# EAGLE board ruido_v5_led (EAGLE 5.10)
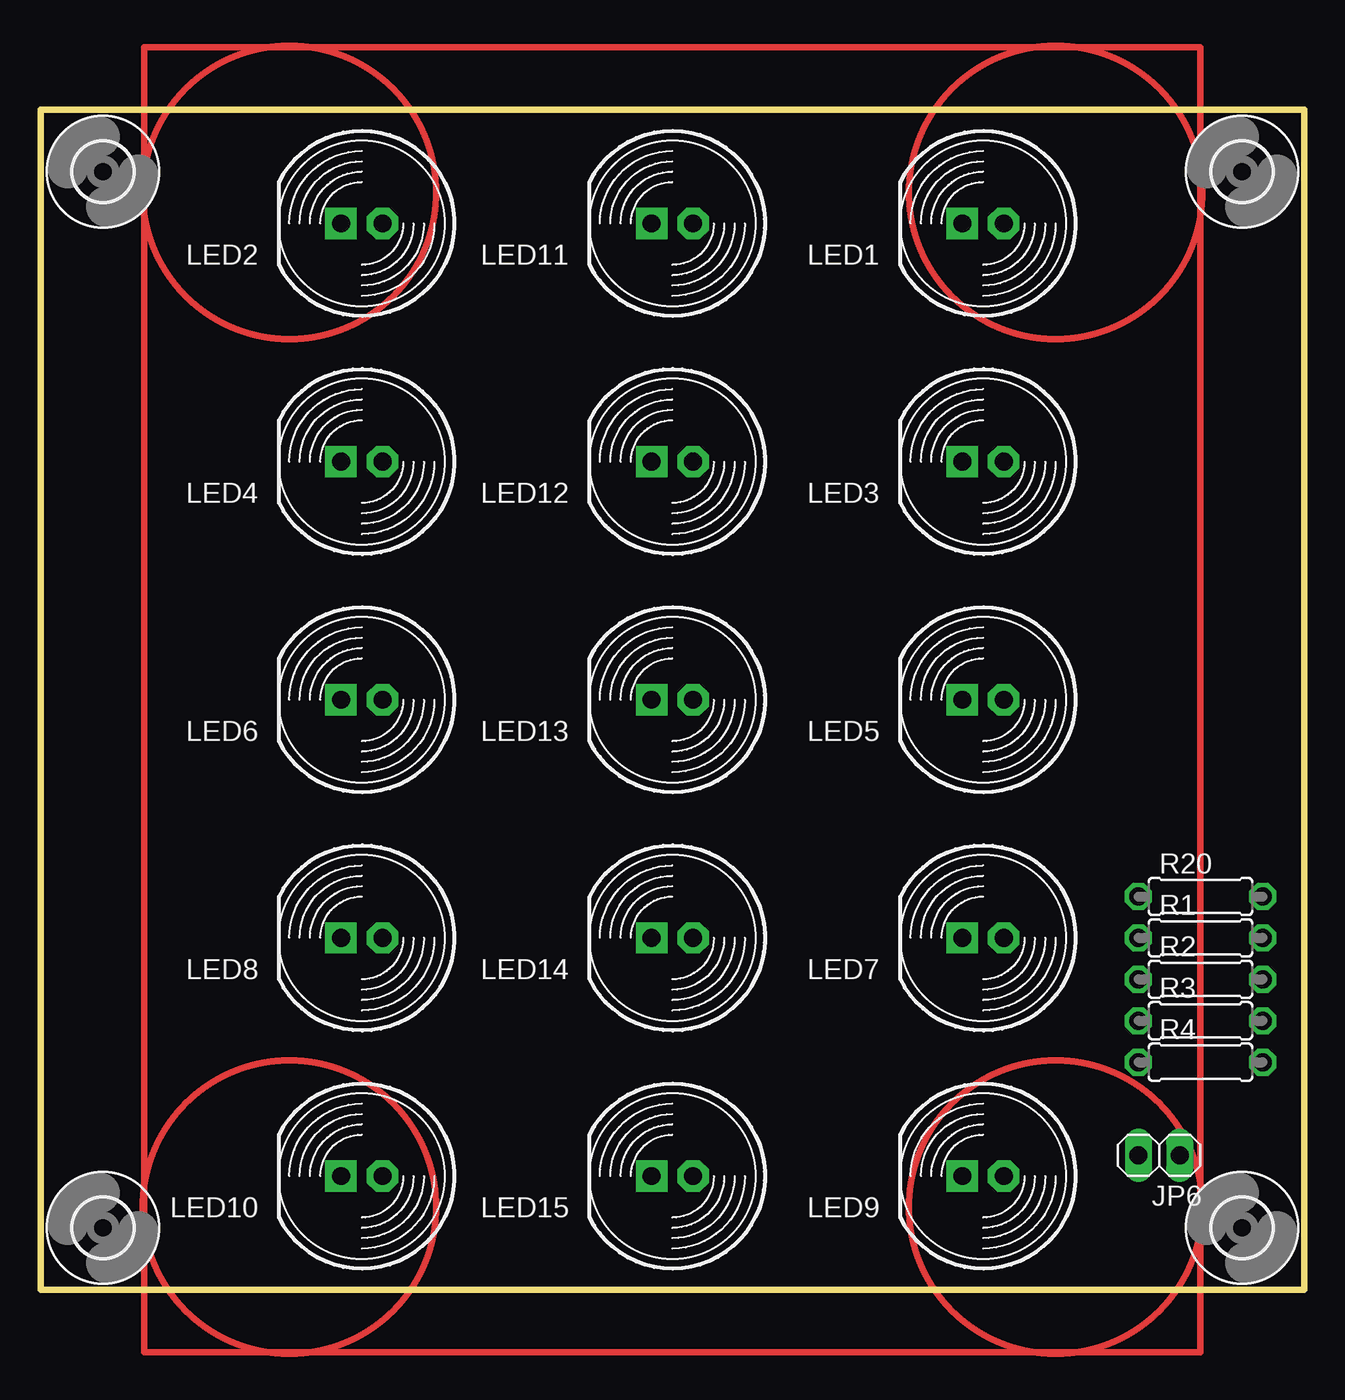
[diagram p0: board, top side]
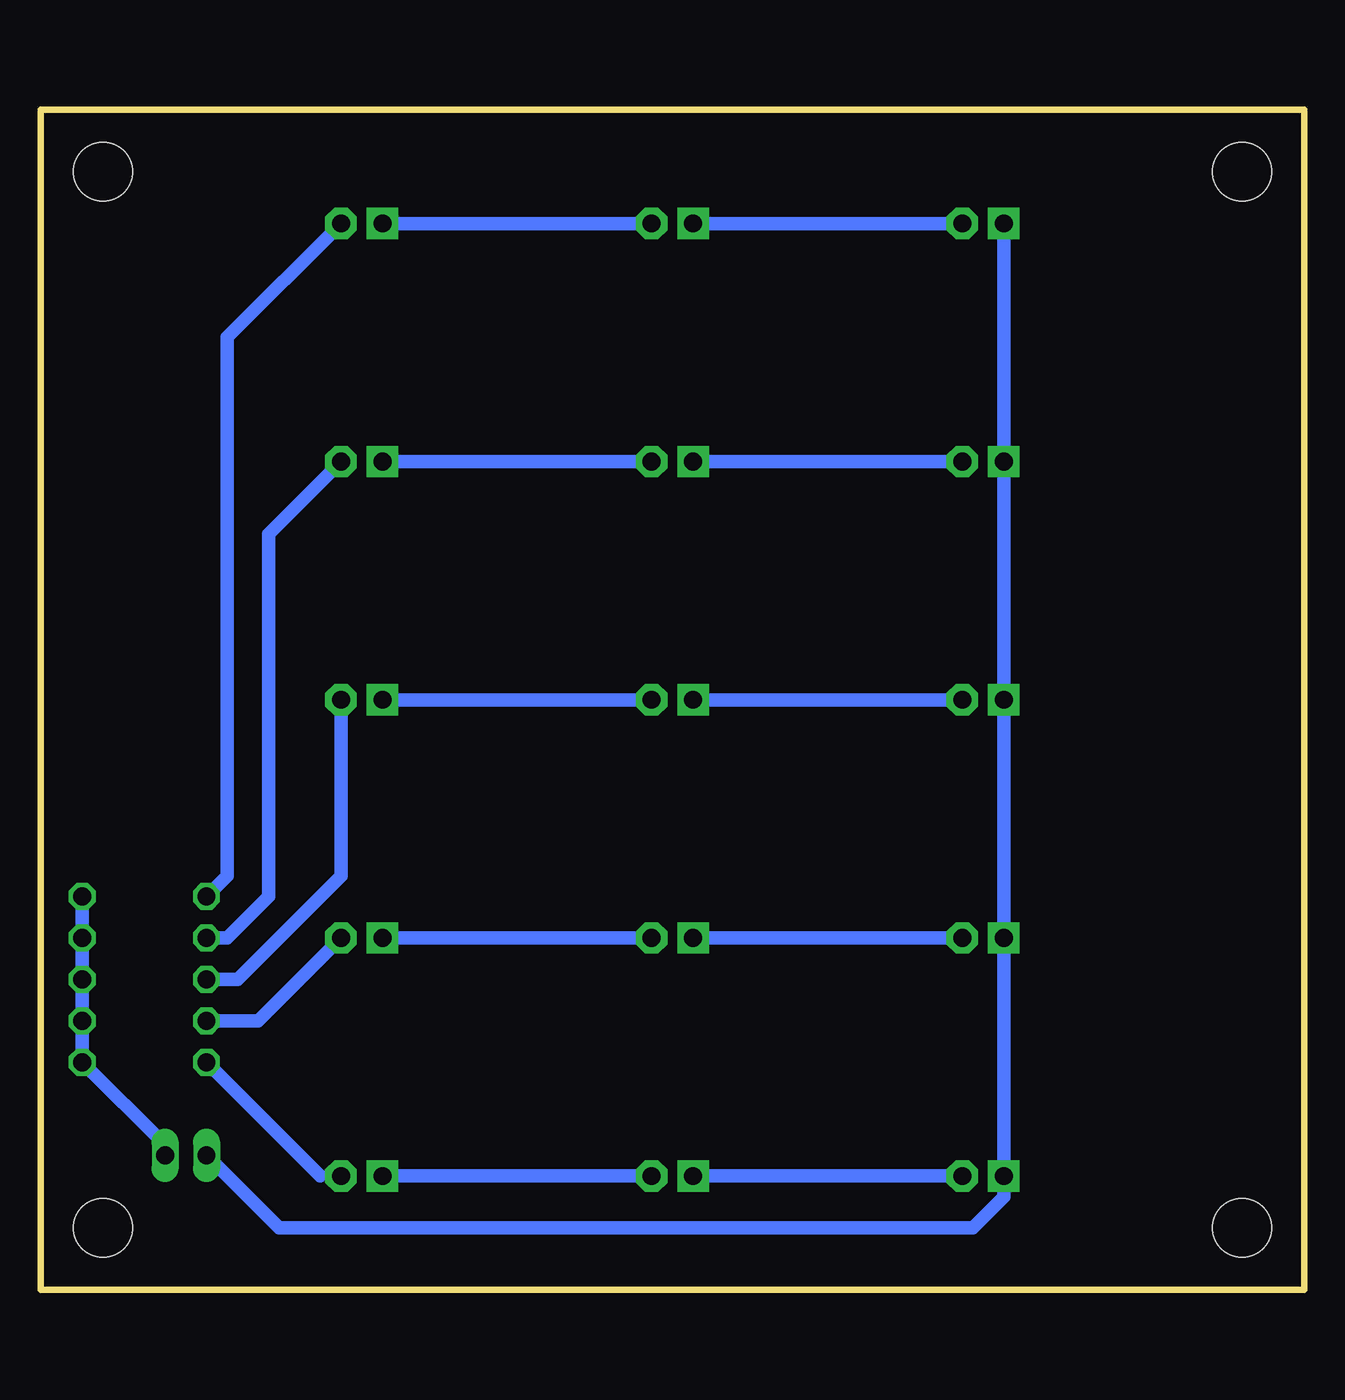
[diagram p1: board, bottom side, seen from below]

Size 77.47 x 72.39 mm. Coordinates in mm from the lower left corner, seen from the top.
Outline: 77.47,0 77.47,72.39 0,72.39 0,0 77.47,0
Copper layers (1*16): Top 0.035mm / dielectric 1.5mm / Bottom 0.035mm
Design rules "default": minimum track width 10mil, minimum drill 24mil, track to track 8mil, track to pad 8mil, pad to pad 8mil, via to via 8mil, smd to smd 8mil, copper to edge 40mil, drill to drill 8mil, minimum pad ring 10mil, minimum via ring 8mil, stop-mask expansion 4mil, vias tented up to drill 0mil, thermal gap 10mil

## Footprints (pad centres in the part's own frame; a part is rotated, then mirrored left to right if it is on the bottom)
1X02 = drill 1.1 long: 1 -1.27,0; 2 1.27,0
LED10MM = drill 1.1 pad 1.93 octagon: A -1.27,0 | drill 1.1 pad 1.93 square: K 1.27,0
0207/7 = drill 1.1 octagon: 1 -3.81,0; 2 3.81,0
3,6 = hole 3.6: 0,0

## Placement (x,y rotation side)
JP6  [1X02]  68.58,8.26 180 top
LED1  [LED10MM]  57.78,65.41 180 top
LED2  [LED10MM]  19.68,65.41 180 top
LED3  [LED10MM]  57.78,50.8 180 top
LED4  [LED10MM]  19.68,50.8 180 top
LED5  [LED10MM]  57.78,36.2 180 top
LED6  [LED10MM]  19.68,36.2 180 top
LED7  [LED10MM]  57.78,21.59 180 top
LED8  [LED10MM]  19.68,21.59 180 top
LED9  [LED10MM]  57.78,6.99 180 top
LED10  [LED10MM]  19.68,6.99 180 top
LED11  [LED10MM]  38.73,65.41 180 top
LED12  [LED10MM]  38.73,50.8 180 top
LED13  [LED10MM]  38.73,36.2 180 top
LED14  [LED10MM]  38.73,21.59 180 top
LED15  [LED10MM]  38.73,6.99 180 top
R1  1 K  [0207/7]  71.12,21.59 0 top
R2  1 K  [0207/7]  71.12,19.05 0 top
R3  1 K  [0207/7]  71.12,16.51 0 top
R4  1 K  [0207/7]  71.12,13.97 0 top
R20  1 K  [0207/7]  71.12,24.13 0 top
U$2  [3,6]  73.66,3.81 90 top
U$3  [3,6]  73.66,68.58 90 top
U$4  [3,6]  3.81,68.58 90 top
U$5  [3,6]  3.81,3.81 90 top

## Library data of the parts
JP6 LED1-LED15 R1-R4 R20 U$2-U$5 = ruido

## Nets
+12V: JP6.1 R1.2 R2.2 R3.2 R4.2 R20.2
GND: JP6.2 LED2.K LED4.K LED6.K LED8.K LED10.K
N$1: LED1.K LED11.A
N$2: LED3.A R1.1
N$3: LED2.A LED11.K
N$4: LED5.A R2.1
N$5: LED3.K LED12.A
N$6: LED7.A R3.1
N$7: LED4.A LED12.K
N$8: LED9.A R4.1
N$9: LED5.K LED13.A
N$10: LED6.A LED13.K
N$11: LED8.A LED14.K
N$12: LED7.K LED14.A
N$13: LED9.K LED15.A
N$14: LED10.A LED15.K
N$30: LED1.A R20.1

## Tracks (layer width: path | path; a pad name or v marks a point on that pad's centre or on a via)
+12V
  Bottom 0.813: JP6.1 69.85,8.89 R4.2 R3.2 R2.2 R1.2 R20.2
GND
  Bottom 0.813: LED2.K LED4.K LED6.K LED8.K LED10.K 18.41,5.71 20.32,3.81 62.87,3.81 JP6.2
N$1
  Bottom 0.813: LED1.K LED11.A
N$2
  Bottom 0.813: LED3.A 63.5,46.35 63.5,24.13 66.04,21.59 R1.1
N$3
  Bottom 0.813: LED11.K LED2.A
N$4
  Bottom 0.813: R2.1 65.41,19.05 59.05,25.4 LED5.A
N$5
  Bottom 0.813: LED3.K LED12.A
N$6
  Bottom 0.813: R3.1 64.14,16.51 LED7.A
N$7
  Bottom 0.813: LED12.K LED4.A
N$8
  Bottom 0.61: LED9.A 60.33,6.99
  Bottom 0.813: 60.33,6.99 R4.1
N$9
  Bottom 0.813: LED5.K LED13.A
N$10
  Bottom 0.813: LED13.K LED6.A
N$11
  Bottom 0.813: LED14.K LED8.A
N$12
  Bottom 0.813: LED7.K LED14.A
N$13
  Bottom 0.813: LED9.K LED15.A
N$14
  Bottom 0.813: LED15.K LED10.A
N$15
  Top 0.406: 6.35,76.2 6.35,-3.81
N$16
  Top 0.406: 6.35,76.2 71.12,76.2
N$17
  Top 0.406: 71.12,76.2 71.12,-3.81
N$18
  Top 0.406: 71.12,-3.81 6.35,-3.81
N$30
  Bottom 0.813: R20.1 66.04,25.4 66.04,58.42 LED1.A
(copper drawn outside any net)
  shapes: Top circle x4